# EAGLE board UV_MONITOR_V3_0 (EAGLE 8.4.2)
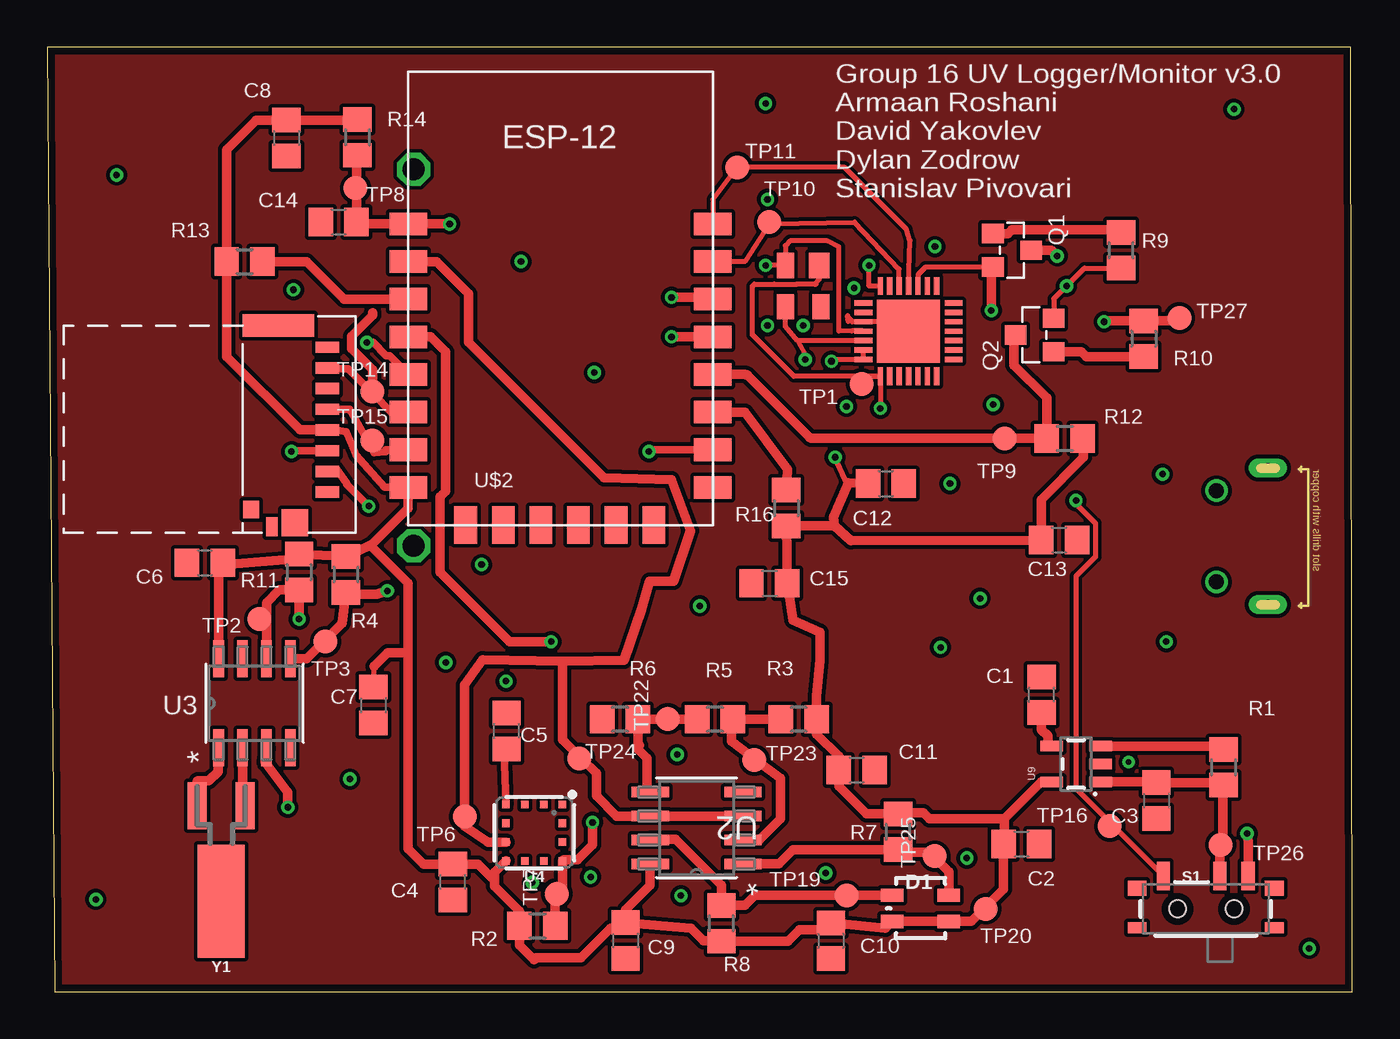
[diagram p0: board, top side]
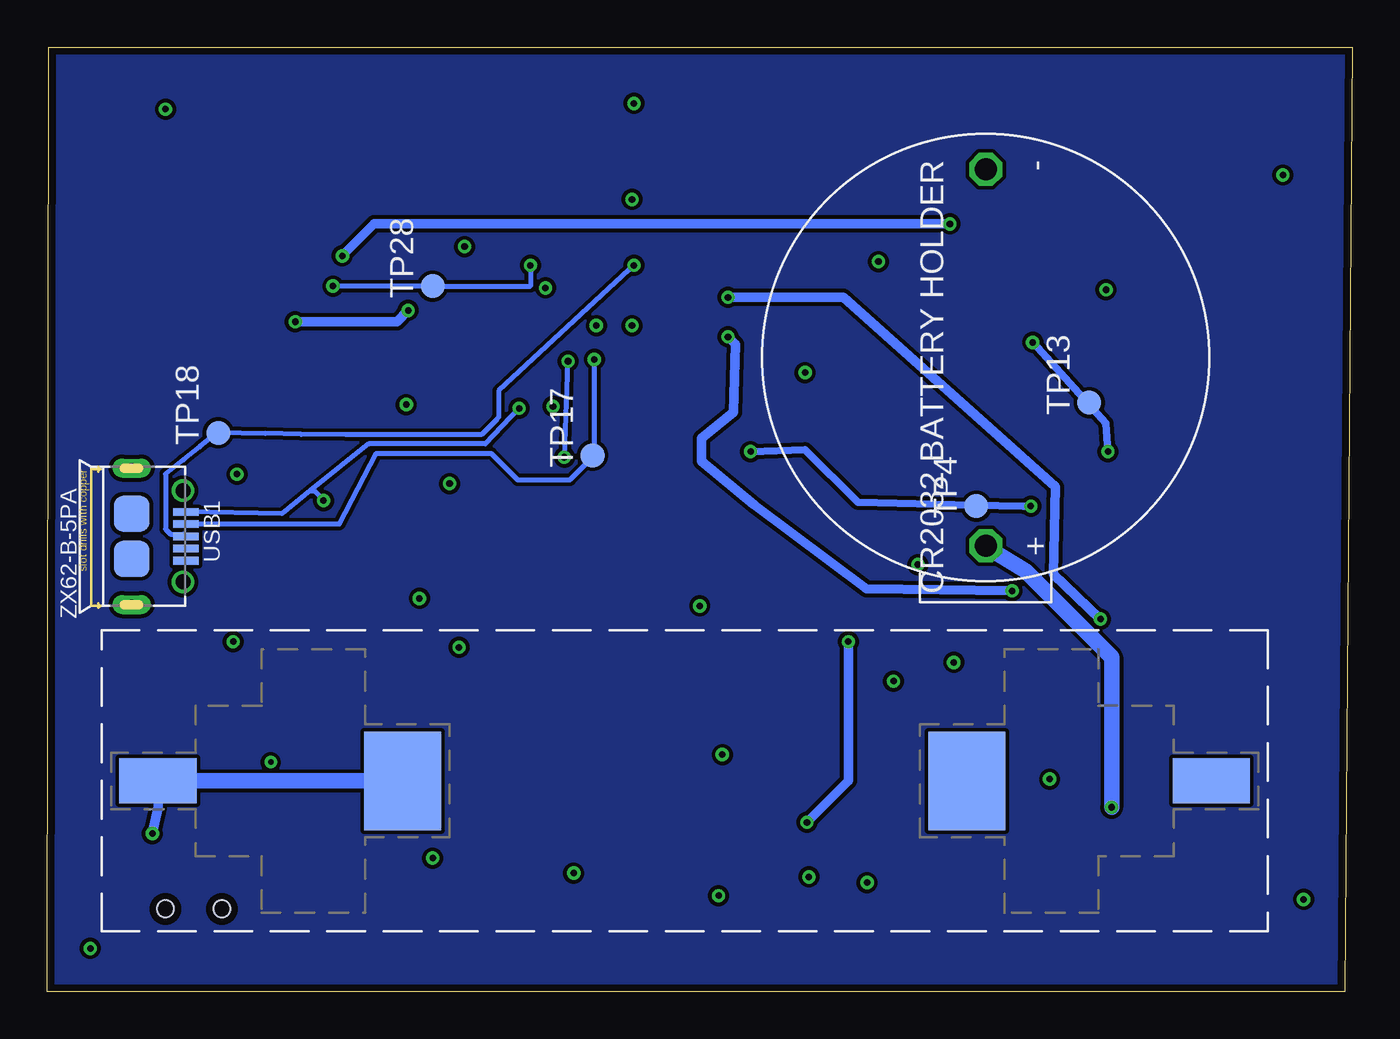
[diagram p1: board, bottom side, seen from below]

Size 69.4 x 50.2 mm. Coordinates in mm from the lower left corner, seen from the top.
Outline: 0.4,0 69.4,0 69.3,50.2 0,50.2 0.4,0
Copper layers (1*16): Top 0.0356mm / dielectric 1.5011mm / Bottom 0.0356mm
Design rules "osh-park-2-layers-design-rules": minimum track width 6mil, minimum drill 10mil, track to track 6mil, track to pad 6mil, pad to pad 6mil, via to via 6mil, smd to smd 6mil, copper to edge 15mil, drill to drill 6mil, minimum pad ring 7mil, minimum via ring 7mil, stop-mask expansion 3mil, vias tented up to drill 0mil, thermal gap 10mil
Net classes: 0 default: clearance 0.205 mm

## Footprints (pad centres in the part's own frame; a part is rotated, then mirrored left to right if it is on the bottom)
C0805 = smd 1.3 x 1.5: 1 -0.95,0; 2 0.95,0
LED-TRICOLOR-SMD = smd 1.2 x 0.7: A 1.5,0.7; B -1.5,0.7; G -1.5,-0.7; R 1.5,-0.7
SOT-23 = smd 1.016 x 1.143: 1 -0.889,-1.016; 2 0.889,-1.016; 3 0,1.016
R0805 = smd 1.3 x 1.5: 1 -0.95,0; 2 0.95,0
SWITCH_SPST_SMD_A = smd 0.7 x 1.5: 1 -2.25,-1.75; 2 -0.75,-1.75; 3 2.25,-1.75 | smd 1 x 0.6: GND1 -3.65,1; GND3 3.65,1 | smd 1 x 0.8: GND2 -3.65,-1.1; GND4 3.65,-1.1 | hole 0.9: -1.5,0; 1.5,0
B1,27 = smd 1.27 x 1.27: TP 0,0
M08A = smd 1.981 x 0.559: 1 -2.464,1.905; 2 -2.464,0.635; 3 -2.464,-0.635; 4 -2.464,-1.905; 5 2.464,-1.905; 6 2.464,-0.635; 7 2.464,0.635; 8 2.464,1.905
SOIC8-N_MC = smd 1.981 x 0.559: 1 -2.362,1.905; 2 -2.362,0.635; 3 -2.362,-0.635; 4 -2.362,-1.905; 5 2.362,-1.905; 6 2.362,-0.635; 7 2.362,0.635; 8 2.362,1.905
ML8511 = smd 0.4 x 0.4: 1 -1.5,-1.5; 2 -1.5,-0.5; 3 -1.5,0.5; 4 -1.5,1.5; 5 -0.5,1.5; 6 0.5,1.5; 7 1.5,1.5; 8 1.5,0.5; 9 1.5,-0.5; 10 1.5,-1.5; 11 0.5,-1.5; 12 -0.5,-1.5
SOT23-5 = smd 0.55 x 1.2: 1 -0.95,-1.3; 2 0,-1.3; 3 0.95,-1.3; 4 0.95,1.3; 5 -0.95,1.3
CP2102 = smd 0.95 x 0.28: CHR0 2.4,-1.5; D+ -2.4,0; D- -2.4,-0.5; DCD -2.4,1.5; GPIO0/TXT 2.4,0.5; GPIO1/RXT 2.4,0; GPIO2/RS485 2.4,-0.5; GPIO3/WAKEUP 2.4,-1; GPIO5 2.4,1.5; GPIO6 2.4,1; GRND -2.4,0.5; RI/CLK -2.4,1; VDD -2.4,-1; VREGIN -2.4,-1.5 | smd 0.28 x 0.95: CHR1 1.5,-2.4; CHREN 1,-2.4; CTS 1,2.4; DSR -1,2.4; DTR -1.5,2.4; GPIO4 1.5,2.4; NC -0.5,-2.4; RSTB -1,-2.4; RTS 0.5,2.4; RXD 0,2.4; SUSP 0.5,-2.4; SUSPB 0,-2.4; TXD -0.5,2.4; VBUS -1.5,-2.4 | smd 3.35 x 3.35: GND 0,0
ESP12F = smd 2 x 1.2: ADC 0,14; EN 0,12; GND 16.2,2; GPIO0 16.2,8; GPIO2 16.2,6; GPIO4 16.2,10; GPIO5 16.2,12; GPIO12 0,6; GPIO13 0,4; GPIO14 0,8; GPIO15 16.2,4; GPIO16 0,10; RST 0,16; RXD 16.2,14; TXD 16.2,16; VCC 0,2 | smd 1.2 x 2: CSO 3.05,0; GPIO9 7.05,0; GPIO10 9.05,0; MISO 5.05,0; MOSI 11.05,0; SCLK 13.05,0
BK-53 = smd 5.25 x 4.1: GND1 0,-15; VBAT1 0,15 | smd 2.4 x 4.1: GND2 0,-28; VBAT2 0,28
BS-7 = drill 1.17 octagon: GND -10,0; VBAT 10,0
MICRO_SD_TFR_HEADER = smd 0.6 x 1.25: 1 3.85,2; 2 2.75,2; 3 1.65,2; 4 0.55,2; 5 -0.55,2; 6 -1.65,2; 7 -2.75,2; 8 -3.85,2 | smd 1.2 x 3.8: GND1 -5,-0.6 | smd 1.45 x 1.4: GND2 5.475,0.275 | smd 1 x 0.6: GND3 5.7,-0.95 | smd 0.95 x 0.85: GND4 4.775,-2.05
SP0503BAHT = smd 0.9 x 1.35: P$1 -0.95,1.1; P$3 0.95,1.1; P$4 0.95,-1.1 | smd 1.1 x 1.35: P$2 -0.85,-1.1
MICRO-USB5+6P-SMD-0.65-AB = smd 0.4 x 1.35: 1 -1.3,2.875; 2 -0.65,2.875; 3 0,2.875; 4 0.65,2.875; 5 1.3,2.875 | smd 1.9 x 1.9: P1 -1.2,0; P2 1.2,0 | drill 0.508 pad 1.016 long: P3 -3.625,0; P4 3.625,0 | drill 0.8: P5 -2.425,2.73; P6 2.425,2.73
CRYSTAL-SMD-2X6-CYL = smd 2.5 x 6: SHEILD 0,5.08 | smd 1 x 2.5: X1 -1.27,0; X2 1.27,0

## Placement (x,y rotation side)
C1  470p  [C0805]  52.87,15.78 90 top
C2  2.2n  [C0805]  51.8,7.85 0 top
C3  2.2n  [C0805]  58.98,10.16 270 top
C4  0.1u  [C0805]  21.57,5.83 90 top
C5  1n  [C0805]  24.43,13.85 90 top
C6  2.2n  [C0805]  8.39,22.79 0 top
C7  2.2n  [C0805]  17.35,15.23 270 top
C8  2.2n  [C0805]  12.73,45.37 270 top
C9  2.2n  [C0805]  30.75,2.72 270 top
C10  2.2n  [C0805]  41.67,2.71 270 top
C11  2.2n  [C0805]  43.04,11.78 0 top
C12  100n  [C0805]  44.6,27 0 top
C13  4.7u  [C0805]  53.8,24 0 top
C14  470p  [C0805]  15.5,40.9 0 top
C15  2.2n  [C0805]  38.4,21.7 0 top
D1  RGB_LED  [LED-TRICOLOR-SMD]  46.44,4.43 180 top
Q1  S8050  [SOT-23]  51.3,39.4 270 top
Q2  S8050  [SOT-23]  52.5,34.9 90 top
R1  10k  [R0805]  62.55,11.93 90 top
R2  10k  [R0805]  26.07,3.5 0 top
R3  80k  [R0805]  39.96,14.47 180 top
R4  4.7k  [R0805]  15.89,22.17 270 top
R5  100k  [R0805]  35.51,14.47 180 top
R6  150k  [R0805]  30.46,14.47 180 top
R7  3k  [R0805]  45.25,8.5 90 top
R8  3k  [R0805]  35.85,3.63 90 top
R9  12k  [R0805]  57.1,39.4 90 top
R10  12k  [R0805]  58.3,34.7 270 top
R11  4.7k  [R0805]  13.4,22.3 270 top
R12  12k  [R0805]  54.1,29.4 0 top
R13  12k  [R0805]  10.5,38.8 0 top
R14  12k  [R0805]  16.5,45.4 270 top
R16  12k  [R0805]  39.3,25.7 270 top
S1  SPDT  [SWITCH_SPST_SMD_A]  61.6,4.4 180 top
TP1  TPB1,27  [B1,27]  43.3,32.3 0 top
TP2  TPB1,27  [B1,27]  11.3,19.8 90 top
TP3  TPB1,27  [B1,27]  14.8,18.6 90 top
TP4  TPB1,27  [B1,27]  20,25.8 90 bottom
TP6  TPB1,27  [B1,27]  22.2,9.3 90 top
TP7  TPB1,27  [B1,27]  27.1,5.2 90 top
TP8  TPB1,27  [B1,27]  16.4,42.7 90 top
TP9  TPB1,27  [B1,27]  50.9,29.4 90 top
TP10  TPB1,27  [B1,27]  38.4,40.9 90 top
TP11  TPB1,27  [B1,27]  36.7,43.8 90 top
TP13  TPB1,27  [B1,27]  14,31.3 90 bottom
TP14  TPB1,27  [B1,27]  17.3,31.9 90 top
TP15  TPB1,27  [B1,27]  17.3,29.3 90 top
TP16  TPB1,27  [B1,27]  56.5,8.8 90 top
TP17  TPB1,27  [B1,27]  40.4,28.5 90 bottom
TP18  TPB1,27  [B1,27]  60.3,29.7 90 bottom
TP19  TPB1,27  [B1,27]  42.5,5.1 90 top
TP20  TPB1,27  [B1,27]  49.9,4.4 180 top
TP22  TPB1,27  [B1,27]  33,14.5 90 top
TP23  TPB1,27  [B1,27]  37.6,12.3 90 top
TP24  TPB1,27  [B1,27]  28.3,12.4 90 top
TP25  TPB1,27  [B1,27]  47.2,7.2 90 top
TP26  TPB1,27  [B1,27]  62.4,7.8 90 top
TP27  TPB1,27  [B1,27]  60.2,35.8 90 top
TP28  TPB1,27  [B1,27]  48.9,37.5 90 bottom
U2  LM2903M  [M08A]  34.53,8.7 180 top
U3  MCP7940N-I/SN  [SOIC8-N_MC]  11.03,15.33 90 top
U4  ML8511 UV_SENSOR  [ML8511]  25.9,8.45 180 top
U9  MIC5219 3.3V  [SOT23-5]  54.7,12.1 90 top
U$1  CP2102  [CP2102]  45.8,35.1 0 top
U$2  ESP12F  [ESP12F]  19.2,24.8 0 top
U$3  BK-53  [BK-53]  35.5,11.2 90 bottom
U$4  BS-7  [BS-7]  19.5,33.7 270 bottom
U$5  MICRO_SD_TFR_HEADER  [MICRO_SD_TFR_HEADER]  12.9,30.4 270 top
U$6  SP0503BAHT  [SP0503BAHT]  40.2,37.5 180 top
USB1  ZX62-B-5PA  [MICRO-USB5+6P-SMD-0.65-AB]  64.9,24.2 270 bottom
Y1  32.768kHz  [CRYSTAL-SMD-2X6-CYL]  9.26,9.88 180 top

## Library data of the parts
C1-C15 = rcl; SPICEPREFIX: C
D1 = SparkFun-LED; PROD_ID: DIO-08324
Q1 Q2 = Seeed-Transistor; MPN: S8050
R1-R14 R16 = rcl; SPICEPREFIX: R
S1 = SparkFun-Switches; PROD_ID: SWCH-10651; SF_SKU: COM-10860
TP1-TP4 TP6-TP11 TP13-TP20 TP22-TP28 = testpad
U2 = LM2903M; MANUFACTURER_PART_NUMBER: LM2903M; VENDOR: Texas Instruments
U3 = MCP7940N; MANUFACTURER_PART_NUMBER: MCP7940NISN; VENDOR: MICROCHIP
U4 = SparkFun-Sensors; PROD_ID: IC-11927
U9 = SparkFun-IC-Power; PROD_ID: VREG-09872
U$1 = CP2102
U$2 = ESP8266-ESP12F
U$3 = BK-53
U$4 = BS-7
U$5 = MicroSD TFR Header
U$6 = SP0503BAHT
USB1 = Seeed-Connector; MPN: ZX62-B-5PA
Y1 = SparkFun-Clocks; PROD_ID: XTAL-07894

## Nets
+3V3: C2.1 C4.2 C6.2 C7.1 C8.1 C9.1 C10.1 C11.1 C12.1 C13.1 C15.2 D1.A D1.B R2.1 R3.1 R4.1 R7.2 R8.1 R11.1 R12.2 R13.1 R14.1 R16.2 TP20.TP U2.8 U3.8 U4.7 U9.5 U$1.VDD U$1.VREGIN U$2.VCC U$5.4
BP: C1.1 U9.4
D+: TP18.TP U$1.D+ U$6.P$4 USB1.3
D-: TP17.TP U$1.D- U$6.P$3 USB1.2
EN: R1.2 U9.3
GND: C1.2 C2.2 C3.2 C4.1 C5.2 C6.1 C7.2 C8.2 C9.2 C10.2 C11.2 C12.2 C13.2 C14.1 C15.1 R6.2 U2.4 U3.4 U4.5 U9.2 U$1.GND U$1.GRND U$2.GND U$3.GND1 U$3.GND2 U$4.GND U$5.GND1 U$5.GND2 U$5.GND3 U$5.GND4 U$6.P$1 USB1.5 USB1.P1 USB1.P2 USB1.P3 USB1.P4 USB1.P5 USB1.P6
GREEN_LED: D1.G R7.1 TP25.TP U2.1
H_REF: R3.2 R5.1 TP23.TP U2.2
L_REF: R5.2 R6.1 TP22.TP U2.5
MAIN_BAT: C3.1 R1.1 S1.2 TP26.TP U9.1
N$1: Q1.1 R9.2
N$2: U3.2 Y1.X1
N$3: Q2.1 R10.2
N$4: R13.2 U$2.EN
N$5: TP14.TP U$2.GPIO12 U$5.7
N$6: U3.1 Y1.X2
N$7: TP4.TP U$2.GPIO15 U$5.2
N$9: TP11.TP U$1.RXD U$2.TXD
N$10: TP10.TP U$1.TXD U$2.RXD
N$11: Q2.2 R9.1 TP28.TP U$1.DTR
N$12: C14.2 Q1.3 R14.2 TP8.TP U$2.RST
N$13: Q2.3 R12.1 TP9.TP U$2.GPIO0
N$14: R16.1 U$2.GPIO2
N$16: TP15.TP U$2.GPIO13 U$5.5
N$17: TP13.TP U$2.GPIO14 U$5.3
RED_LED: D1.R R8.2 TP19.TP U2.7
RTC_SCL: R11.2 TP2.TP U3.6 U$2.GPIO5
RTC_SDA: R4.2 TP3.TP U3.5 U$2.GPIO4
RTS: Q1.2 R10.1 TP27.TP U$1.RTS
TR: C5.1 U4.10
UV_ADC: TP6.TP TP24.TP U2.3 U2.6 U4.8 U$2.ADC
UV_SEN_EN: R2.2 TP7.TP U4.4 U$2.GPIO16
VBAT: U3.3 U$4.VBAT
VBATT: S1.1 U$3.VBAT1 U$3.VBAT2
VBUS: S1.3 TP1.TP TP16.TP U$1.VBUS U$6.P$2 USB1.1

## Tracks (layer width: path | path; a pad name or v marks a point on that pad's centre or on a via)
+3V3  (via drill 0.35)
  Top 0.254: U$1.VDD U$1.VREGIN 41.8,33.6 v41.7,33.5 | C12.1 42.55,26.95 v41.9,28.4 | 17.4,17.3 17.35,17.25 C7.1
  Top 0.406: U$2.VCC 17.95,26.8 16.43,28.52 16.13,29.22 15.89,29.76 15.29,29.86 U$5.4
  Top 0.508: 50.9,9.2 50.9,7.9 C2.1 50.85,5.45 49.9,4.5 | 50.9,9.2 52.85,11.15 U9.5 | 49.9,4.5 49.13,3.73 D1.B D1.A 44.57,3.36 C10.1 41.61,3.3 40,3.3 39.38,2.68 R8.1 35.83,2.7 34.9,2.7 34.23,3.37 C9.1 | C9.1 30.75,4.35 32.07,5.67 U2.8 | C9.1 29.97,3.37 28.4,1.8 26,1.8 25.9,1.7 25.12,2.48 R2.1 25.12,4.28 23.8,5.6 23.8,5.9 | 23.8,5.9 23.8,6.35 U4.7 | 23.8,5.9 22.92,6.78 C4.2 20.02,6.78 19.2,7.6 19.2,18 | 50.9,9.2 46.9,9.2 46.6,9.5 45.3,9.5 R7.2 43.55,9.45 42.09,10.91 C11.1 42.1,12.5 40.91,13.69 R3.1 40.9,15.7 41.1,17.6 41.1,19.1 39.65,19.75 C15.2 R16.2 41.85,24.75 | U3.8 9.12,22.48 C6.2 9.39,22.69 13.3,23 13.35,22.9 R11.1 15.86,23.15 R4.1 17.18,23.72 17.2,23.7 | 17.2,23.7 19.2,25.7 U$2.VCC | 17.2,23.7 19.2,21.7 19.2,18 | 17.4,17.3 18.1,18 19.2,18 | U$5.4 13.45,29.85 9.55,33.75 R13.1 9.55,44.75 11.12,46.32 C8.1 16.47,46.32 R14.1 | 41.85,24.75 42.75,23.95 C13.1 52.85,26.15 55.1,28.4 55.1,29.35 R12.2 | C12.1 42.6,27.05 41.8,25.2 41.85,24.75 | TP20.TP 49.9,4.5
  Bottom 0.254: v41.9,28.4 v41.7,33.5
BP
  Top 0.508: C1.1 52.87,13.93 53.2,13.6 53.2,13.25 U9.4
D+  (via drill 0.35)
  Top 0.254: U$1.D+ 43.38,35.12 42.79,35.12 42.1,35.1 42.1,39.6 41.5,39.9 39.5,39.9 39.25,39.65 U$6.P$4 v38.2,38.6
  Bottom 0.254: v38.2,38.6 38.43,38.37 38.45,38.37 45.38,31.93 45.38,30.54 45.51,30.39 46.3,29.6 53.5,29.6 55.88,29.62 57.8,29.66 60.35,29.72 | USB1.3 62.14,24.32 62.84,24.32 63.1,24.58 63.1,27.51 62.16,28.26 61.28,28.96 60.44,29.65
  Bottom 0.508: 60.44,29.65 60.42,29.65 60.35,29.72 60.33,29.7 TP18.TP
D-  (via drill 0.35)
  Top 0.254: U$1.D- 39.9,34.6 | U$6.P$3 39.25,35.35 39.9,34.6 | 39.9,34.6 40.4,33.7 v40.3,33.6
  Bottom 0.254: USB1.2 53.86,24.85 51.9,28.61 45.79,28.61 44.38,27.2 41.6,27.2 40.3,28.5 v40.3,33.6
  Bottom 0.508: TP17.TP 40.3,28.5
EN
  Top 0.508: R1.2 62.38,13.05 U9.3
GND  (via drill 0.3, 0.35)
  Top 0.254: U$1.GND 45.3,35.6 U$1.GRND 42.8,35.6 42.59,35.81 42.59,35.61 42.56,35.94
  other vias: 59.5,18.6 38.2,47.2 63.1,46.9 67.1,2.3 2.6,4.9 28.9,6.1 33.7,5.1 41.4,6.3 48.9,7.1 25.8,5.8 29.1,32.9 21.2,17.5 34.7,20.5 25.2,38.8 24.4,16.5 47.2,39.6 38.3,42.1 40.2,35.4 38.3,35.4 48,27 42.9,37.4 57.5,12.2 47.5,18.3 3.7,43.4 13.1,37.3 33.5,12.6 16.1,11.3 50.3,31.2 23.1,22.7 59.3,27.5 49.6,20.9 42.5,31.1
GREEN_LED
  Top 0.508: U2.1 38.9,6.8 39.65,7.55 R7.1 45.4,7.4 46.9,7.4 47.2,7.1 | 47.2,7.1 47.94,6.36 D1.G | TP25.TP 47.2,7.1
H_REF
  Top 0.508: R3.2 R5.1 36.4,14.41 36.4,13.3 37.75,12.27 | 37.75,12.27 39,11.33 39,9.2 37.87,8.06 U2.2 | TP23.TP 37.73,12.3 37.75,12.27
L_REF
  Top 0.508: 31.41,13.19 R6.1 33.1,14.47 | 31.41,13.19 31.5,13.1 | 31.41,13.19 31.41,12.89 31.9,12.4 31.9,10.77 U2.5 | 33.1,14.47 R5.2 | TP22.TP 33.03,14.47 33.1,14.47
MAIN_BAT
  Top 0.508: U9.1 58.94,11.15 C3.1 62.42,11.11 R1.1 62.5,10.93 62.5,7.7 | S1.2 62.35,7.25 62.5,7.7 | TP26.TP 62.5,7.7
N$1
  Top 0.508: Q1.1 51.09,40.29 51.3,40.5 56.95,40.5 R9.2
N$2
  Top 0.508: Y1.X1 10.39,10.02 U3.2
N$3
  Top 0.508: Q2.1 55,34 55.25,33.75 R10.2
N$4
  Top 0.508: U$2.EN 15.8,36.8 13.8,38.8 R13.2
N$5
  Top 0.406: U$2.GPIO12 18.3,30.8 17.35,31.75 16,33.1 14.95,33.1 U$5.7
  Top 0.508: 17.35,31.75 17.3,31.8 TP14.TP 17.3,33.05 16.19,34.16 16.19,34.84 17.3,35.95 17.3,36.09
N$6
  Top 0.508: U3.1 9.1,12.94 9.1,11.7 8.6,11.2 8,11.2 7.99,11.19 Y1.X2
N$7  (via drill 0.35)
  Top 0.406: U$5.2 15.19,27.66 15.39,27.76 15.93,27.02 15.93,26.97 v17.1,25.8 | v32,28.7 32.1,28.8 U$2.GPIO15
  Bottom 0.406: v17.1,25.8 17.5,25.8 20.1,25.86 26.3,26 29.1,28.8 v32,28.7
  Bottom 0.508: TP4.TP 20.06,25.86 20.1,25.86
N$8
  pour Top: 0.53,0 0.53,50.04 69.23,50.04 69.23,0.25 0.4,0.25
N$9
  Top 0.254: U$1.RXD 45.78,37.52 45.88,39.91 45.68,40.52 42.4,43.8 TP11.TP 36.6,43.7 35.39,42.1 U$2.TXD
N$10
  Top 0.254: U$1.TXD 45.3,38.4 42.94,40.9 38.5,40.8 38.4,40.8 37.1,38.8 U$2.RXD
  Top 0.508: TP10.TP 38.5,40.8 | 38.5,40.8
N$11  (via drill 0.35)
  Top 0.254: U$1.DTR 43.7,37.5 v43.7,38.6 | Q2.2 53.52,36.82 v54.2,37.5 55.15,38.45 R9.1
  Bottom 0.254: v43.7,38.6 43.7,37.5 49,37.5 | 49,37.5 v54.2,37.5 | 49,37.5 TP28.TP
N$12  (via drill 0.35)
  Top 0.508: 16.45,42.6 16.45,44.4 R14.2 | 16.45,42.6 C14.2 16.55,40.8 U$2.RST v21.4,40.8 | Q1.3 53.4,39.4 v53.7,39.1 | TP8.TP 16.4,42.65 16.45,42.6
  Bottom 0.508: v53.7,39.1 52,40.8 v21.4,40.8
N$13
  Top 0.508: Q2.3 51.4,34.82 51.4,33.3 53.15,31.55 R12.1 51,29.4 | U$2.GPIO0 37.09,32.8 arc-45 37.27,32.73 40.53,29.47 arc45 40.7,29.4 51,29.4 | TP9.TP 51,29.4
N$14
  Top 0.508: U$2.GPIO2 37.1,30.8 39.35,27.75 R16.1
N$15
  pour Bottom: 0.4,0.13 0.4,50.16 69.11,50.16 69.23,50.04 69.23,0.25 69.11,0.13 0.53,0.13
N$16
  Top 0.406: U$2.GPIO13 18,28.8 18,28.7 17.4,28.65 17.18,29.03 16.1,30.95 | U$5.5 16.1,30.95 | 16.1,30.95 16.1,30.9
  Top 0.508: TP15.TP 17.3,29.15 17.18,29.03
N$17  (via drill 0.35)
  Top 0.406: U$2.GPIO14 18.21,33.79 18.03,33.79 17.32,34.5 v17,34.5 | v13,28.7 13.05,28.75 U$5.3
  Bottom 0.406: v17,34.5 13.81,30.99 13.1,30.2 v13,28.7
  Bottom 0.508: TP13.TP 14,31.17 13.81,30.99
RED_LED
  Top 0.508: U2.7 32.1,8.1 33.4,8.1 35.85,5.65 R8.2 35.87,4.6 37.1,4.6 37.63,5.13 42.7,5.13 | 42.7,5.13 D1.R | TP19.TP 42.67,5.1 42.7,5.13
RTC_SCL  (via drill 0.35)
  Top 0.508: 11.67,19.9 U3.6 | 11.67,19.9 11.67,20.66 12.35,21.35 R11.2 v13.4,19.8 | v33.2,36.9 35.3,36.9 U$2.GPIO5 | TP2.TP 11.4,19.9 11.67,19.9
  Bottom 0.508: v33.2,36.9 27.05,36.9 15.79,26.84 15.89,22.19 v13.4,19.8
RTC_SDA  (via drill 0.35)
  Top 0.508: U3.5 13.79,17.69 14.65,18.55 | 15.88,21.13 15.69,19.59 14.65,18.55 | 15.88,21.13 R4.2 | U$2.GPIO4 v33.2,34.8 | v18.1,21.3 17.53,21.13 15.88,21.13 | TP3.TP 14.7,18.6 14.65,18.55
  Bottom 0.508: v33.2,34.8 32.81,34.41 32.9,30.8 34.6,29.4 34.6,28.18 31.81,25.86 25.85,21.4 v18.1,21.3
RTS  (via drill 0.35)
  Top 0.254: Q1.2 46.7,38.5 46.3,38.1 U$1.RTS
  Top 0.508: v56.2,35.6 56.25,35.65 R10.1 60.05,35.65 TP27.TP | v50.2,36.2 50.2,38.43 Q1.2
  Bottom 0.508: v56.2,35.6 50.8,35.6 v50.2,36.2
TR
  Top 0.406: U4.10 24.3,12.77 C5.1
UV_ADC
  Top 0.508: U2.3 U2.6 30.26,9.34 29.2,10.4 29.2,11.6 28.45,12.35 | U$2.ADC 20.7,38.8 22.4,37.1 22.4,34.5 29.6,27.3 33.2,27.2 34.2,24.5 33.3,21.8 32.02,21.8 31.61,20.31 30.66,17.61 27.4,17.55 | 27.4,17.55 27.4,13.4 28.45,12.35 | 27.4,17.55 23.15,17.65 22.2,16.3 22.2,9.2 | 22.2,9.2 22.2,8.8 23.45,7.95 U4.8 | TP6.TP 22.2,9.2 | TP24.TP 28.35,12.35 28.45,12.35
UV_SEN_EN  (via drill 0.35)
  Top 0.508: 27.4,5.2 U4.4 27.45,7 28.2,7 29,7.8 v29,9 | 27.4,5.2 27,4.8 27,3.52 R2.2 | U$2.GPIO16 20.4,34.8 21.2,34 21.2,26.6 20.9,26.3 20.9,22.3 24.6,18.6 v26.8,18.6 | TP7.TP 27.4,5.2
  Bottom 0.508: v26.8,18.6 26.8,11.2 v29,9
VBAT  (via drill 0.35)
  Top 0.508: U3.3 11.7,12.93 11.6,12.2 12.8,10.6 v12.8,9.8
  Bottom 0.813: U$4.VBAT 19.36,23.56 17.4,22.36 12.8,17.76 v12.8,9.8
VBATT  (via drill 0.35)
  Top 0.508: S1.1 63.85,7.95 v63.8,8.4
  Bottom 0.508: v63.8,8.4 63.5,9.8 U$3.VBAT2
  Bottom 0.813: U$3.VBAT2 U$3.VBAT1
VBUS  (via drill 0.35)
  Top 0.254: U$1.VBUS 39.7,32.7 37.5,34.9 37.5,37.5 37.6,37.6 38.66,37.6 38.66,37.59 39.84,37.59 39.84,37.6 40.8,37.6 | 40.8,37.6 40.9,37.6 | U$6.P$2 41.05,37.85 40.8,37.6 | U$1.VBUS v44.3,31 | S1.3 56.65,8.85 56.45,9.05 54.7,10.8 54.7,22.08 55.73,23.11 55.73,24.89 54.7,25.92 v54.7,26.1 | TP1.TP 43.5,32.7 U$1.VBUS
  Top 0.508: 56.65,8.85 56.55,8.85 TP16.TP 56.45,8.85 56.45,9.05
  Bottom 0.254: v44.3,31 46.09,29.11 52.3,29.11 55.41,26.61 | USB1.1 56.91,25.4 55.41,26.61 | 55.41,26.61 55.21,26.61 v54.7,26.1

## Text on the board
tPlace: Group 16 UV Logger/Monitor v3.0 / Armaan Roshani / David Yakovlev / Dylan Zodrow / Stanislav Pivovari